# Altium PCB USB.pcbdoc
Units mil, origin at the board's own origin, x right, y up, seen from the top; angles counter-clockwise.
Board outline 1643 x 1751.58 mil, 2 copper layers (Top Layer, Bottom Layer); 1 components, 0 nets, 12 pads, 0 vias.
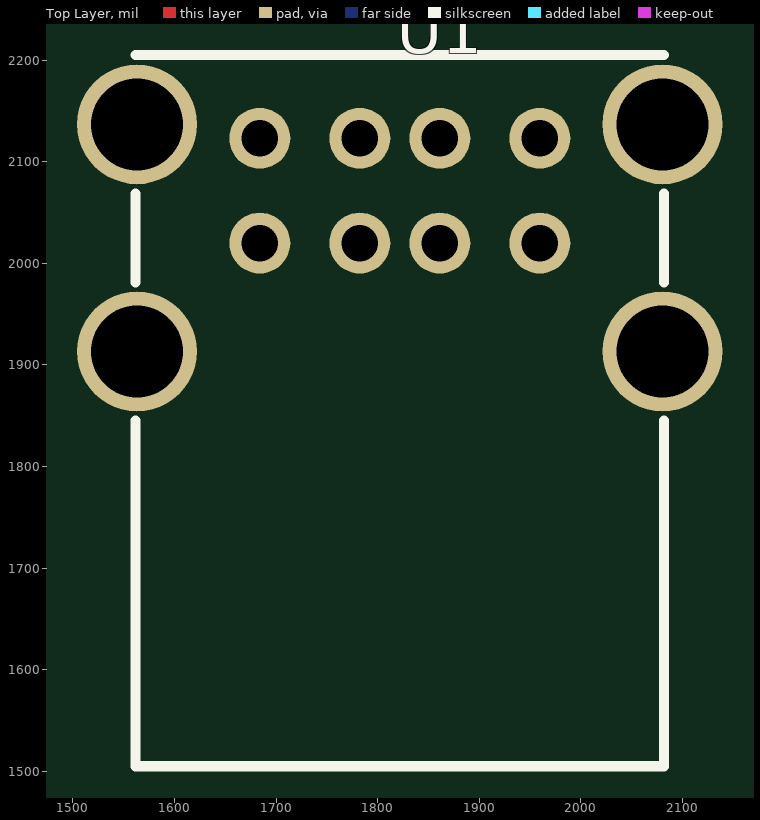
[diagram p0: Top Layer view]
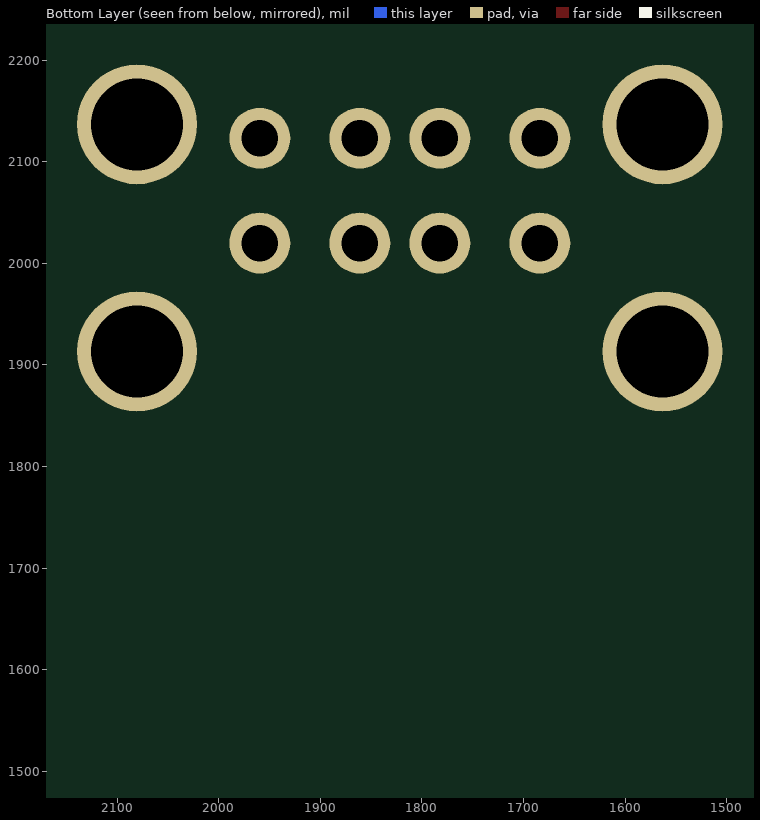
[diagram p1: Bottom Layer view, seen from below]

## Layer stack, top to bottom
Top Layer: signal copper (thickness not stored)
Dielectric: dielectric 12.6, FR-4, Dk 4.8
Bottom Layer: signal copper (thickness not stored)

## Board outline
2643,1000 1000,1000 1000,2751.58 2643,2751.58

## Components (designator, comment, footprint, x,y, rotation, side; value= is the part's Value field where it differs from the comment)
U1 "USB-A-TH_KH-2AF90DIP-1715" USB-A-TH_KH-2AF90DIP-1715 1821.8,2025 r0 top

## Footprints (in the part's own frame and the unit in brackets; to place one, negate y for a bottom-side part, rotate by r counter-clockwise, add the part's x,y. Pads: shape width x height; smd on the part's side, far side on the other; paste and mask are expansions set on the pad)
USB-A-TH_KH-2AF90DIP-1715 [mm]
  round 1.524 hole 0.914: 1(-3.5,2.49) 2(-1,2.49) 3(1,2.49) 4(3.5,2.49) 5(-3.5,-0.13) 6(-1,-0.13) 7(1,-0.13) 8(3.5,-0.13)
  round 3 hole 2.3: 9(-6.57,2.84) 10(6.57,2.84) 11(-6.57,-2.84) 12(6.57,-2.84)
  silkscreen extent -6.6,-13.21 6.6,4.57

## Nets (pads, with @x,y where several pads share a name; then routed paths per layer and width w, separated by ;. In a path a pad name is that pad's centre, name@x,y a point inside that pad or via, vN(x,y) a via of type N, cw(c..) or ccw(c..) an arc to the next point about the centre after c; other vN are vias at no path point)
pads on no net: U1.1 U1.2 U1.3 U1.4 U1.5 U1.6 U1.7 U1.8 U1.9 U1.10 U1.11 U1.12

## Silkscreen, mask and mechanical layers (free items; w line width, h text height)
Document:
  lines w0.1: 1820.5,1874.79 1822.5,1876.79